# Altium PCB ECS_V1.01.PcbDoc (part 2 of 2)
Units mil, origin at the board's own origin, x right, y up, seen from the top; angles counter-clockwise.
Board outline 6229 x 5687 mil, 4 copper layers (Top Layer, Groud, Power, Bottom Layer); 228 components, 181 nets, 866 pads, 721 vias.
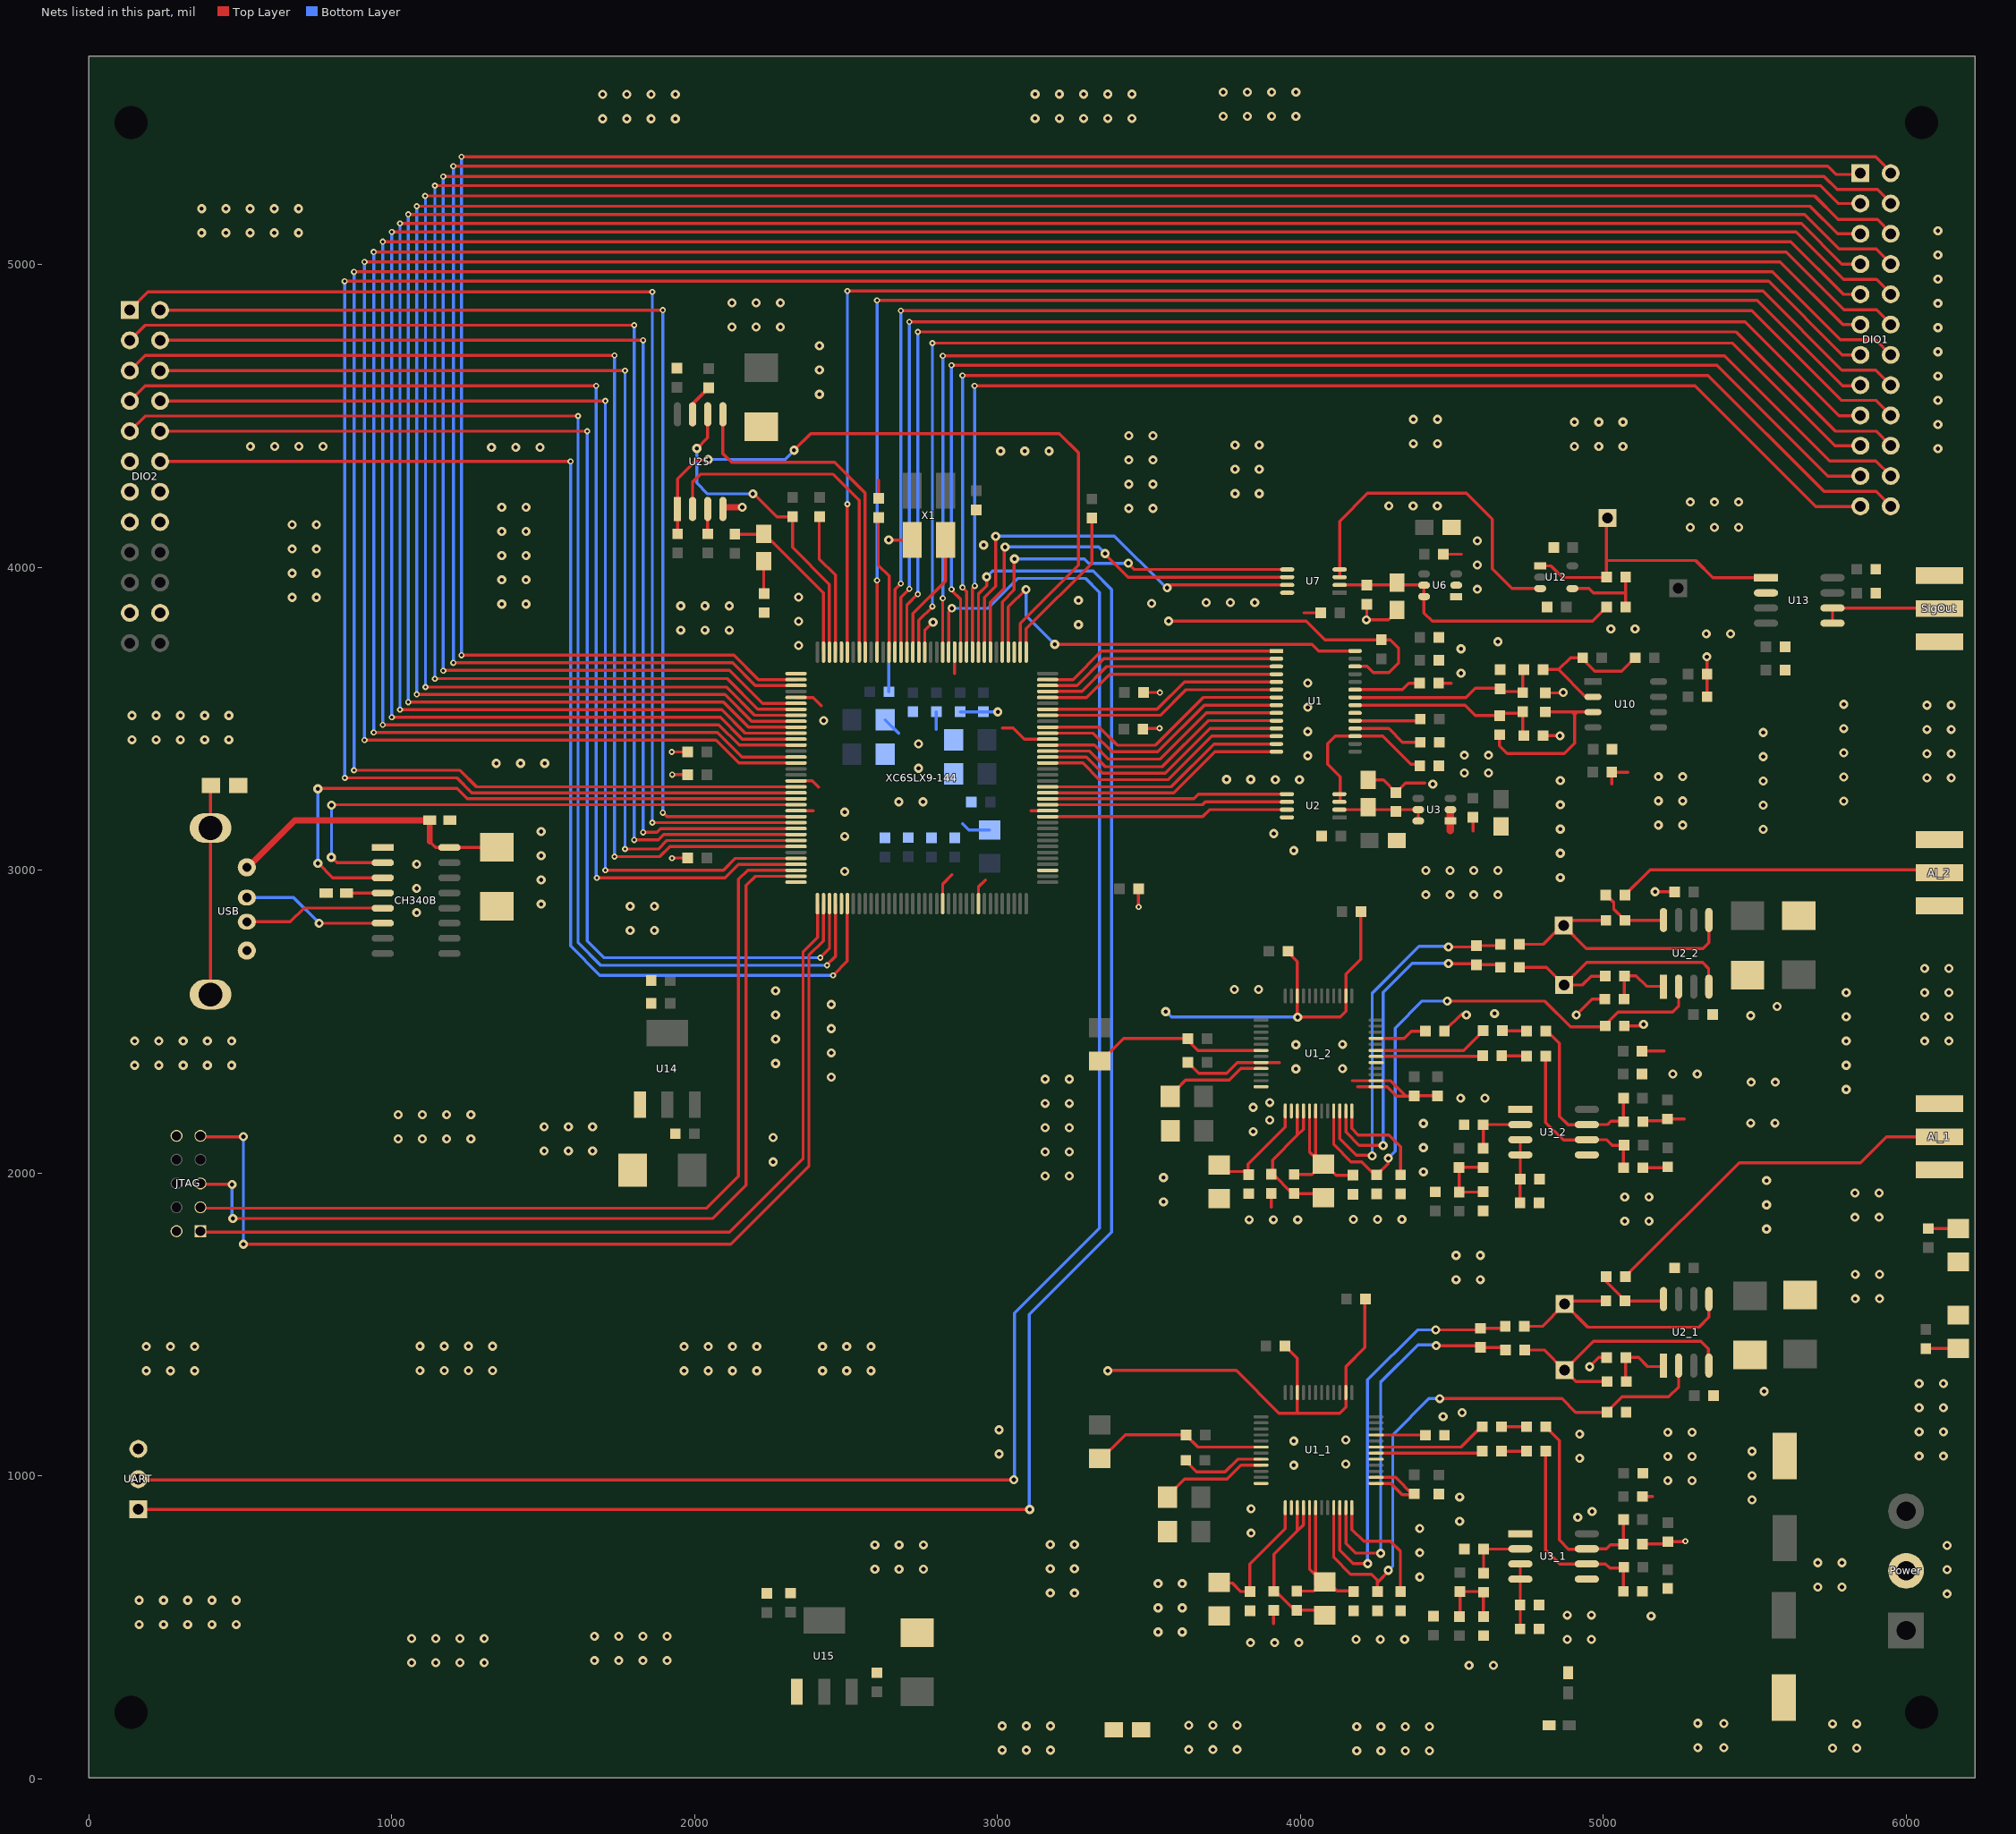
[diagram p4: the nets of this part, all layers, seen from the top]

## Via types
v1: diameter 30, hole 14, Top Layer to Bottom Layer, 624 vias
v2: diameter 20, hole 10, Top Layer to Bottom Layer, 77 vias
v3: diameter 50, hole 28, Top Layer to Bottom Layer, 19 vias
v4: diameter 28, hole 14, Top Layer to Bottom Layer, 1 vias

## Nets (pads, with @x,y where several pads share a name; then routed paths per layer and width w, separated by ;. In a path a pad name is that pad's centre, name@x,y a point inside that pad or via, vN(x,y) a via of type N, cw(c..) or ccw(c..) an arc to the next point about the centre after c; other vN are vias at no path point) (continued)
AGND: AI_1.2 AI_2.2 C1.1 C2.1 C2_1.2 C2_2.2 C4.2 C5_1.2 C5_2.2 C6.2 C7.1 C9.1 C10.2 C10_1.2 C10_2.2 C12.1 C13.2 C14.1 C15.2 C15_1.2 C15_2.2 C17.2 C17_1.2 C17_2.2 C18.2 C18_1.2 C18_2.2 C19_1.2 C19_2.2 C21.2 C21_1.2 C21_2.2 C22.2 C22_1.2 C22_2.2 C23.2 C23_1.2 C23_2.2 C24.2 C30.2 C31.2 C32_1.2 C32_2.2 C34_1.2 C34_2.2 C35_1.2 C35_2.2 C36_1.2 C36_2.2 C38_1.2 C38_2.2 C39_1.2 C39_2.2 C50_1.2 C50_2.2 C60_1.2 C60_2.2 C62.2 C69_1.1 C69_2.1 C70.2 C70_1.1 C70_2.1 C71_1.1 C71_2.1 C76.1 C77.1 C78.2 C79.2 C87.1 C88.1 C105.1 C107.2 D1.2 D3.1 Power.2 R3.2 R5.1 R10.1 R10_1.1 R10_2.1 R11.2 R11_1.1 R11_2.1 R12.2 R14_1.2 R14_2.2 R15_1.2 R15_2.2 R30_1.2 R30_2.2 R34_1.1 R34_2.1 R38_1.2 R38_2.2 R43_1.1 R43_2.1 SigOut.2 U1.20 U1_1.1 U1_1.2 U1_1.5 U1_1.32 U1_1.33 U1_1.36 U1_1.38 U1_2.1 U1_2.2 U1_2.5 U1_2.32 U1_2.33 U1_2.36 U1_2.38 U2.8 U3.1 U3.2 U3_1.1 U3_1.5 U3_2.1 U3_2.5 U6.1 U6.2 U7.8 U13.2 | length 3908.3
  Top Layer w10: C23_1.2@3579,951 3617,989 3758,989 3804,1035 U1_1.33@3870,1035 ; C23_2.2@3592,2278 3621,2307 3765,2307 3803,2345 U1_2.33@3870,2345 ; C38_2.2@3628.76,2365.25 3665.02,2329 3756,2329 3792,2365 U1_2.32@3870,2365 3931,2365 ; C38_1.2@3629,1041 3657,1013 3751,1013 3793,1055 U1_1.32@3870,1055 ; 3903.75,1887.25 C34_2.2@3903.75,1932.76 ; 3911.75,512.25 C34_1.2@3911.75,555.76 ; 4011.75,3850.25 C70.2@4066.76,3850.25 ; 4171,2305 U1_2.2@4250,2305 4297,2305 4347,2255 ; 4189,2285 U1_2.1@4250,2285 4286,2285 4317,2254 C36_2.2@4387,2254 ; v1(4218,3827) v1@4219.25,3827 ; C14.1@4219.25,3878.24 v1@4219.25,3827 ; C17.2@4224,3298 4274,3298 C12.1@4316,3256 ; U1_1.1@4250,975 4299,975 4336,938 4371,938 4314,995 U1_1.2@4250,995 ; C13.2@4320,3856 4291,3827 v1@4219.25,3827 ; C12.1@4327,3268 4347,3288 4411,3288 ; C36_2.2@4387,2255 C39_2.2@4459,2255 ; C10.2@4456.24,3617.75 4497.75,3617.75 ; C23.2@4472.24,4043.75 4531.75,4043.75 ; R10_2.1@4475.76,2469.25 4532.5,2526 ; 4569.75,3129.25 C15.2@4569.75,3174.76 ; R11.2@4801.24,3444.75 v1@4850.25,3444.75 ; R10.1@4808.75,3585.76 v1@4867.24,3585.76 ; v1@4911,2523 4962.75,2574.75 R34_2.1@5005.24,2574.75 ; v1@4956,1362 4984.75,1390.75 R34_1.1@5011.24,1390.75 ; 5028.24,3284.76 C78.2@5028.24,3323.75 5080.75,3323.75 ; C5_2.2@5069.24,2485.75 v1@5130.75,2485.75 ; C10_2.2@5128.24,2402.75 5200.75,2402.75 ; R14_1.2@5129.24,774.75 C17_1.2@5217.75,774.75 ; C18_1.2@5129.24,931.75 5162.25,931.75 ; R14_2.2@5129.24,2172.75 C17_2.2@5207.75,2172.75 ; R15_2.2@5130.24,2017.75 C19_2.2@5205.75,2017.75 ; v1@5171.25,2928.75 C70_2.1@5235.24,2928.75 ; C17_2.2@5211.75,2178.76 5268.24,2178.76 ; C17_1.2@5213.75,782.76 v2@5271.24,782.76 ; C77.1@5342.76,3566.76 C77.1@5342.76,3573.25 C76.1@5342.76,3648.25 v1@5342.76,3705
  Top Layer w25: 4495.4,3131.4 U3.2@4495.4,3200.11
  other v1: 4186,92 4266,92 4346,92 4426,92 3631,96 3711,96 3791,96 5757,101 5837,101 5312,102 5398,102 4186,172 4266,172 4346,172 4426,172 3631,176 3711,176 3791,176 5757,181 5837,181 5398,182 5312,183 4557,374 4637,374 3835,449 3915,449 3995,449 4184,460 4264,460 4344,460 4881,460 4961,460 3530,484 3610,484 5158,537 4881,540 4961,540 3530,564 3610,564 6135,610 5708,633 5788,633 3530,644 3610,644 4394,666 6135,690 5708,713 5788,713 4394,746 6135,770 3837,811 4394,826 4526,850 4916,863 4963,882 3837,891 5491,921 4526,930 5213,984 5293,984 5491,1001 3978,1035 4150,1039 4922,1058 5213,1064 5293,1064 6043,1065 6123,1065 5491,1081 3978,1115 4150,1119 4922,1138 5213,1144 5293,1144 6043,1145 6123,1145 4471,1196 4534,1209 6043,1225 6123,1225 5531,1279 6043,1305 6123,1305 4955,1360 5832,1585 5912,1585 4514,1648 4594,1648 5832,1665 5912,1665 4514,1728 4594,1728 5539,1815 5071,1841 5151,1841 3831,1846 3911,1846 3991,1846 4175,1847 4255,1847 4335,1847 5831,1854 5911,1854 5539,1895 3548,1905 5071,1921 5151,1921 5831,1934 5911,1934 5539,1975 3548,1985 4406,2004 4406,2084 3844,2137 4406,2164 5487,2165 5567,2165 3899,2175 3844,2217 3899,2233 4529,2247 4609,2247 5802,2276 5488,2300 5568,2300 5230,2327 5310,2327 3985,2344 4139,2345 5802,2356 3985,2424 4139,2425 5802,2436 6061,2436 6141,2436 5133,2491 5802,2516 6061,2516 6141,2516 5487,2520 4548,2522 4911,2522 4641,2527 5574,2550 5802,2596 6061,2596 6141,2596 3782,2606 3862,2606 6061,2676 6141,2676 4414,2919 4494,2919 4572,2919 4652,2919 5171,2929 4858,2976 4414,2999 4494,2999 4572,2999 4652,2999 4858,3056 3978,3065 3912,3121 5528,3135 4858,3136 5182,3149 5262,3149 5528,3215 4858,3216 5794,3228 5182,3229 5262,3229 4437,3284 5528,3295 4858,3296 3917,3299 3997,3299 3756,3300 3836,3300 6069,3305 6149,3305 5794,3308 5182,3309 5262,3309 4541,3321 4621,3321 5528,3375 4024,3378 4541,3380 4621,3380 6069,3385 6149,3385 5794,3388 4857,3444 5528,3455 4024,3458 6069,3465 6149,3465 5794,3468 4024,3538 6069,3545 6149,3545 5794,3548 4868,3587 4024,3618 4530,3651 5342,3705 4530,3731 4652,3755 5340,3781 5420,3781 5025,3797 5105,3797 3689,3884 3769,3884 3849,3884 4584,3928 4584,4008 4584,4088 5287,4132 5367,4132 5447,4132 4292,4203 4372,4203 4452,4203 5287,4216 5367,4216 5447,4216 3784,4244 3864,4244 3784,4324 3864,4324 6105,4392 4905,4400 4985,4400 5065,4400 3784,4404 3864,4404 4373,4409 4453,4409 6105,4472 4905,4480 4985,4480 5065,4480 4373,4489 4453,4489 6105,4552 6105,4632 6105,4712 6105,4792 6105,4872 6105,4952 6105,5032 6105,5112 3745,5490 3825,5490 3905,5490 3985,5490 3745,5570 3825,5570 3905,5570 3985,5570
  other v2: 5271,784
BT0: XC6SLX9-144.39
BT1: R24.1 U25.1 XC6SLX9-144.38 | length 2326.8
  Top Layer w10: R24.1@1943,4117 1943,4218.08 1943,4292 2006,4355 v1@2046,4355 ; v1@2329,4388 2383,4442 3204,4442 3267,4379 3267,4007 3074.8,3814.8 XC6SLX9-144.38@3074.8,3720.35
  Bottom Layer w10: v1@2043,4357 2299,4357 2328,4386 v1(2328,4387)
  other v1: 2045,4356
CLK+_1: C46_1.2 U1_1.7 | length 364.9
  Top Layer w10: U1_1.7@4250,1095 4530,1095 C46_1.2@4590,1155
CLK+_2: C46_2.2 U1_2.7 | length 380.7
  Top Layer w10: U1_2.7@4250,2405 4539,2405 4601,2467 C46_2.2@4601,2471
CLK-_1: C49_1.2 U1_1.6 | length 340
  Top Layer w10: U1_1.6@4250,1075 C49_1.2@4590,1075
CLK-_2: C49_2.2 U1_2.6 | length 346
  Top Layer w10: U1_2.6@4250,2385 C49_2.2@4596,2385
CML_1: C5_1.1 C50_1.1 U1_1.45 U2_1.2 | length 2036.8
  Top Layer w10: U1_1.45@4110,895 4110,731 4166,675 ; 4167,675 4235,675 4254,656 C50_1.1@4254,615 ; C50_1.1@4254.75,617.76 4254.75,648.75 v1@4292.5,686.5 ; v1(4460,1255) 4864,1255 4909,1210 C5_1.1@5009,1210 ; C5_1.1@5012.24,1210.75 5062.5,1261 5216,1261 5249,1294 U2_1.2@5249,1370
  Bottom Layer w10: v1(4290,688) 4305,703 4305,1136 4424,1255 v1(4460,1255)
CML_2: C5_2.1 C50_2.1 U1_2.45 U2_2.2 | length 1897.5
  Top Layer w10: U1_2.45@4110,2205 4110,2094 4167,2037 4202,2037 4238,2001 C50_2.1@4244,2001 ; C50_2.1@4251.75,1993.76 4289,2031.01 v1@4289,2045 ; v1(4484.75,2567.76) 4807.24,2567.76 4892,2483 5000,2483 5049,2532 5229,2532 5249,2552 U2_2.2@5249,2621
  Bottom Layer w10: v1(4290,2049) 4313,2072 4313,2479 4402,2568 v1@4487,2568
CTR1: DIO2.8 XC6SLX9-144.104 | length 3665.9
  Top Layer w10: DIO2.8@235,4550 v2(1705,4550) ; v2(1705,3000) 2095,3000 2134.25,3039.25 XC6SLX9-144.104@2334.65,3039.25
  Bottom Layer w10: v2(1705,3000) v2(1705,4550)
CTR2: DIO2.10 XC6SLX9-144.111 | length 4080.6
  Top Layer w10: DIO2.10@235,4450 v2(1645,4450) ; v2(2415,2711) 2415,2712 2445,2742 XC6SLX9-144.111@2445,2893
  Bottom Layer w10: v2(1645,4450) 1645,2767 1701,2711 v2(2415,2711)
CTR3: DIO2.12 XC6SLX9-144.114 | length 4114.3
  Top Layer w10: DIO2.12@235,4350 v2(1590,4350) ; v2@2457,2653 2503.94,2699.94 XC6SLX9-144.114@2503.94,2889.65
  Bottom Layer w10: v2(1590,4350) 1590,2750 1687,2653 v2@2453,2653
  other v2: 2456.94,2652.94
D1: DIO2.1 XC6SLX9-144.98 | length 3977.1
  Top Layer w10: DIO2.1@135,4850 195,4910 v2(1860,4910) ; v2(1860,3157.36) XC6SLX9-144.98@2334.65,3157.36
  Bottom Layer w10: v2(1860,3157.36) v2(1860,4910)
D2: DIO2.3 XC6SLX9-144.100 | length 3927.8
  Top Layer w10: DIO2.3@135,4750 185,4800 v2(1800,4800) ; v2(1800,3100) 1880,3100 1897.99,3117.99 XC6SLX9-144.100@2334.65,3117.99
  Bottom Layer w10: v2(1800,3100) v2(1800,4800)
D3: DIO2.5 XC6SLX9-144.102 | length 3889.3
  Top Layer w10: DIO2.5@135,4650 185,4700 v2(1735,4700) ; v2(1735,3045) 1885,3045 1918.62,3078.62 XC6SLX9-144.102@2334.65,3078.62
  Bottom Layer w10: v2(1735,3045) v2(1735,4700)
D4: DIO2.7 XC6SLX9-144.105 | length 3858.8
  Top Layer w10: DIO2.7@135,4550 185,4600 v2(1675,4600) ; v2@1680,2975 2100,2975 2144.57,3019.57 XC6SLX9-144.105@2334.65,3019.57
  Bottom Layer w10: v2@1675,2975 v2(1675,4600)
  other v2: 1677,2975
D5: DIO2.9 XC6SLX9-144.112 | length 4307.8
  Top Layer w10: DIO2.9@135,4450 185,4500 v2(1615,4500) ; v2@2436,2687 2464.57,2715.57 XC6SLX9-144.112@2464.57,2889.65
  Bottom Layer w10: v2(1615,4500) 1615,2760 1689,2686 v2(2437,2686)
D6: DIO2.2 XC6SLX9-144.97 | length 3765
  Top Layer w10: DIO2.2@235,4850 v2(1895,4850) ; v2(1895,3190) 1907.95,3177.05 XC6SLX9-144.97@2334.65,3177.05
  Bottom Layer w10: v2(1895,3190) v2(1895,4850)
D7: DIO2.4 XC6SLX9-144.99 | length 3729.9
  Top Layer w10: DIO2.4@235,4750 v2(1830,4750) ; v2(1830,3125) 1875,3125 1887.68,3137.68 XC6SLX9-144.99@2334.65,3137.68
  Bottom Layer w10: v2(1830,3125) v2(1830,4750)
D8: DIO2.6 XC6SLX9-144.101 | length 3691.4
  Top Layer w10: DIO2.6@235,4650 v2(1770,4650) ; v2(1770,3070) 1880,3070 1908.31,3098.31 XC6SLX9-144.101@2334.65,3098.31
  Bottom Layer w10: v2(1770,3070) v2(1770,4650)
D+: CH340B.5 USB.3 | length 466.9
  Top Layer w10: USB.3@521.21,2829.68 664,2829.68 ; 664.68,2829.68 710,2875 CH340B.5@970,2875
D-: CH340B.6 USB.2 | length 484.5
  Top Layer w10: v1(760,2825) CH340B.6@970,2825
  Bottom Layer w10: USB.2@521.21,2909.68 676,2909.68 ; 675.32,2909.68 v1(760,2825)
DAC904_CLK: U1.28 XC6SLX9-144.40 | length 1451.3
  Top Layer w10: XC6SLX9-144.40@3035.43,3720.35 3035.43,3869.43 3094,3928 v1(3094,3927) ; v1(3189,3746) 4037,3746 ; 4038,3746 4059.8,3724.2 U1.28@4180.47,3724.2
  Bottom Layer w10: v1(3094,3927) 3094,3841 v1@3188,3747
DAC904_D1: U1.1 XC6SLX9-144.35 | length 800.7
  Top Layer w10: XC6SLX9-144.35@3165.35,3629.8 3248.8,3629.8 3343,3724 U1.1@3927,3724
DAC904_D2: U1.2 XC6SLX9-144.34 | length 791.9
  Top Layer w10: XC6SLX9-144.34@3165.35,3610.12 3262.12,3610.12 3350.61,3698.61 U1.2@3920.63,3698.61
DAC904_D3: U1.3 XC6SLX9-144.33 | length 790.8
  Top Layer w10: XC6SLX9-144.33@3165.35,3590.43 3278.43,3590.43 3361,3673 U1.3@3922,3673
DAC904_D4: U1.4 XC6SLX9-144.32 | length 789.2
  Top Layer w10: XC6SLX9-144.32@3165.35,3570.75 3293.75,3570.75 3370,3647 U1.4@3923,3647
DAC904_D5: U1.5 XC6SLX9-144.30 | length 792.2
  Top Layer w10: XC6SLX9-144.30@3165.35,3531.38 3526.38,3531.38 3617,3622 U1.5@3920,3622
DAC904_D6: U1.6 XC6SLX9-144.29 | length 789.6
  Top Layer w10: XC6SLX9-144.29@3165.35,3511.69 3537.69,3511.69 3622,3596 U1.6@3920,3596
DAC904_D7: U1.7 XC6SLX9-144.27 | length 848.7
  Top Layer w10: XC6SLX9-144.27@3165.35,3472.32 3335.68,3472.32 3395,3413 3522,3413 3680,3571 U1.7@3924,3571
DAC904_D8: U1.8 XC6SLX9-144.26 | length 849
  Top Layer w10: XC6SLX9-144.26@3165.35,3452.64 3316.36,3452.64 3378,3391 3529,3391 3683,3545 U1.8@3925,3545
DAC904_D9: U1.9 XC6SLX9-144.24 | length 837.2
  Top Layer w10: XC6SLX9-144.24@3165.35,3413.27 3319.73,3413.27 3366,3367 3536,3367 3689,3520 U1.9@3920,3520
DAC904_D10: U1.10 XC6SLX9-144.23 | length 836
  Top Layer w10: XC6SLX9-144.23@3165.35,3393.58 3304.42,3393.58 3356,3342 3544,3342 3696,3494 U1.10@3917,3494
DAC904_D11: U1.11 XC6SLX9-144.22 | length 840.3
  Top Layer w10: XC6SLX9-144.22@3165.35,3373.9 3293.1,3373.9 3347,3320 3554,3320 3702,3468 U1.11@3922,3468
DAC904_D12: U1.12 XC6SLX9-144.21 | length 845.2
  Top Layer w10: XC6SLX9-144.21@3165.35,3354.21 3281.79,3354.21 3337,3299 3563,3299 3707,3443 U1.12@3928,3443
DAC904_D13: U1.13 XC6SLX9-144.17 | length 816.3
  Top Layer w10: XC6SLX9-144.17@3165.35,3275.47 3573.47,3275.47 3715,3417 U1.13@3923,3417
DAC904_D14: U1.14 XC6SLX9-144.16 | length 813.1
  Top Layer w10: XC6SLX9-144.16@3165.35,3255.79 3581.79,3255.79 3718,3392 U1.14@3922,3392
DAC8551_CLK: U2.6 XC6SLX9-144.14 | length 788.6
  Top Layer w10: XC6SLX9-144.14@3165.35,3216.42 3676.42,3216.42 3686,3226 U2.6@3950,3226
DAC8551_CLK_BIAS: U7.6 XC6SLX9-144.43 | length 1348.2
  Top Layer w10: XC6SLX9-144.43@2976.38,3720.35 2976.38,3885.38 3022,3931 v1@3022,4068 ; v1@3354.5,4044.5 3431.25,3967.75 U7.6@3956.38,3967.75
  Bottom Layer w10: v1@3023,4068 3334,4068 3357,4045 3358,4046 v1(3355,4046)
  other v1: 3025,4067
DAC8551_DIN: U2.7 XC6SLX9-144.12 | length 801.2
  Top Layer w10: XC6SLX9-144.12@3165.35,3177.05 3677.05,3177.05 3700,3200 U2.7@3957,3200
DAC8551_DIN_BIAS: U7.7 XC6SLX9-144.44 | length 1417.1
  Top Layer w10: XC6SLX9-144.44@2956.69,3720.35 2956.69,3900.69 2994,3938 v1(2994,4103) ; v1@3560,3932 3570.16,3942.16 U7.7@3956.38,3942.16
  Bottom Layer w10: v1@2996,4104 3386,4104 3547.5,3942.5
  other v1: 3560,3933
DAC8551_SYN: U2.5 XC6SLX9-144.15 | length 799.8
  Top Layer w10: XC6SLX9-144.15@3165.35,3236.1 3648.1,3236.1 3663,3251 U2.5@3959,3251
DAC8551_SYN_BIAS: U7.5 XC6SLX9-144.41 | length 1236.9
  Top Layer w10: XC6SLX9-144.41@3015.75,3720.35 3015.75,3886.75 3055,3926 v1@3055,4028 ; v1@3422,4016 3429,4016 3451.66,3993.34 U7.5@3956.38,3993.34
  Bottom Layer w10: v1(3056,4028) 3286,4028 3301,4013 v1@3419,4013
  other v1: 3432,4014
DC_OUTPUT: DC_Output.1 R31.2 U12.1 U13.1 | length 963.5
  Top Layer w10: U12.1@4791.72,4005.17 4827.83,4005.17 4866,3967 R31.2@5001,3967 ; 5010,4023 5010.76,4023 ; R31.2@5010.76,3968.25 5010.76,4023 ; DC_Output.1@5010.76,4156 5010.76,4023 ; U13.1@5537,3966 5362,3966 5305,4023 5010.76,4023
DGND: C6_1.2 C6_2.2 C14_1.2 C14_2.2 C16_1.2 C16_2.2 C26.2 C30_1.2 C30_2.2 C33.2 C34.2 C35.2 C36.1 C37.1 C38.1 C39.1 C40.1 C41.1 C42.1 C43.1 C44.1 C45.1 C46.1 C47.2 C48.2 C49.2 C50.2 C51.2 C56.1 C57.1 C58.1 C59.1 C60.1 C61.1 C64.2 C65.2 C66.1 C67.2 C90.1 C91.1 C92.1 C93.1 C94.1 C95.2 CH340B.1 DIO2.11 DIO2.13 DIO2.14 DIO2.15 DIO2.16 DIO2.21 DIO2.22 JTAG.6 JTAG.10 L1.1 R3.1 R19.2 R20.2 U1.26 U1_1.14 U1_1.22 U1_1.30 U1_2.14 U1_2.22 U1_2.30 U14.1 U15.1 U25.4 UART.3 USB.4 X1.2 XC6SLX9-144.3 XC6SLX9-144.13 XC6SLX9-144.25 XC6SLX9-144.49 XC6SLX9-144.54 XC6SLX9-144.68 XC6SLX9-144.73 XC6SLX9-144.77 XC6SLX9-144.91 XC6SLX9-144.96 XC6SLX9-144.108 XC6SLX9-144.113 XC6SLX9-144.130 XC6SLX9-144.136 | length 6588.8
  Top Layer w10: v2(1924.25,3390.75) C46.1@1977.24,3390.75 ; v2(1925.75,3315.75) C38.1@1977.24,3315.75 ; v2@1930.75,3040.75 C37.1@1977.24,3040.75 ; XC6SLX9-144.96@2334.65,3196.73 2391.73,3196.73 ; XC6SLX9-144.91@2334.65,3295.16 2388.84,3295.16 2409,3275 ; XC6SLX9-144.77@2334.65,3570.75 2391.25,3570.75 2418,3544 ; R20.2@2607.25,4228.24 2607.25,4287.75 ; v1@2647.5,4090.5 X1.2@2718.19,4090.5 ; XC6SLX9-144.54@2759.84,3720.35 2759.84,3792.84 v1@2785,3818 ; XC6SLX9-144.130@2818.9,2889.65 2818.9,2954.9 2849,2985 ; 2858.27,3650.27 XC6SLX9-144.49@2858.27,3720.35 ; XC6SLX9-144.136@2937.01,2889.65 2937.01,2945.01 2960,2968 ; 3016,3470 3052,3470 3089.05,3432.95 XC6SLX9-144.25@3165.35,3432.95 ; 3110.27,3196.73 XC6SLX9-144.13@3165.35,3196.73 ; C6_1.2@3342.5,1055.5 3422.25,1135.25 C16_1.2@3622.76,1135.25 ; C6_2.2@3345,2373 3416.25,2444.25 C16_2.2@3628.76,2444.25 ; v1@3364,1348 3788,1348 3929,1207 3990,1207 ; v2@3465,2886 C42.1@3465,2938.99 ; C45.1@3477.76,3468.25 v2@3531.25,3468.25 ; C39.1@3481.76,3587.25 v2@3536.75,3587.25 ; v1@3562,3823 4019,3823 4080.76,3761.24 C26.2@4267.25,3761.24 4296.76,3761.24 4324,3734 4324,3684 4293,3653 4241,3653 4220,3674 U1.26@4183,3674 ; C16_1.2@3623,1133 3661,1095 U1_1.30@3870,1095 ; C16_2.2@3629,2437 3661,2405 U1_2.30@3870,2405 ; C14_1.2@3949.24,1428.75 3990,1387.98 U1_1.22@3990,1275 3990,1207 ; C14_2.2@3956,2732 3990,2698 U1_2.22@3990,2585 v1@3990,2514 ; v1(3991,2515) 4131,2515 4150,2534 U1_2.14@4150,2585 4150,2657 4199,2706 C30_2.2@4199,2863 ; C30_1.2@4205,1579 4213,1571 4213,1424 4150,1361 U1_1.14@4150,1275 4150,1227 4130,1207 3990,1207
  Top Layer w20: U25.4@2092,4199 v1(2157,4199)
  Bottom Layer w10: C49.2@2629.24,3497 2674,3452.24 ; C95.2@2641.24,3589.25 2641.24,3686.24 ; 2797.75,3464.75 C91.1@2797.75,3523.24 ; C92.1@2876.75,3523.24 C93.1@2953.75,3523.24 v1@2994.24,3523.24 ; 2884,3154 2904.76,3133.24 C48.2@2974,3133.24 ; v1@3556,2533 3574,2515 v1(3991,2515)
  other v1: 3015,94 3095,94 3175,94 3015,174 3095,174 3175,174 1065,383 1145,383 1225,383 1305,383 1669,390 1749,390 1829,390 1909,390 1065,463 1145,463 1225,463 1305,463 1669,470 1749,470 1829,470 1909,470 166,509 246,509 326,509 406,509 486,509 166,589 246,589 326,589 406,589 486,589 3174,613 3254,613 2595,692 2675,692 2755,692 3174,693 3254,693 2595,772 2675,772 2755,772 3174,773 3254,773 3005,1072 3005,1152 189,1347 269,1347 349,1347 1965,1347 2045,1347 2125,1347 2205,1347 2422,1347 2502,1347 2582,1347 3364,1347 1093,1348 1173,1348 1253,1348 1333,1348 189,1427 269,1427 349,1427 1965,1427 2045,1427 2125,1427 2205,1427 2422,1427 2502,1427 2582,1427 1093,1428 1173,1428 1253,1428 1333,1428 3157,1990 3237,1990 2259,2037 3157,2070 3237,2070 1503,2073 1583,2073 1663,2073 1021,2113 1101,2113 1181,2113 1261,2113 2259,2117 3157,2150 3237,2150 1503,2153 1583,2153 1663,2153 1021,2193 1101,2193 1181,2193 1261,2193 3157,2230 3237,2230 3157,2310 3237,2310 2451,2317 151,2356 231,2356 311,2356 391,2356 471,2356 2267,2362 2451,2397 151,2436 231,2436 311,2436 391,2436 471,2436 2267,2442 2451,2477 2267,2522 3555,2533 2451,2557 2267,2602 1787,2801 1867,2801 1082,2860 1787,2881 1867,2881 1493,2888 1082,2940 1493,2968 2495,2996 1082,3020 1493,3048 2495,3112 1493,3128 2495,3192 2674,3226 2754,3226 2739,3337 1345,3353 1425,3353 1505,3353 2739,3417 142,3431 222,3431 302,3431 382,3431 462,3431 2426,3494 142,3511 222,3511 302,3511 382,3511 462,3511 3001,3523 2343,3742 1954,3793 2034,3793 2114,3793 3267,3811 2787,3819 2343,3822 3565,3823 1954,3873 2034,3873 2114,3873 1363,3879 1443,3879 3509,3881 3267,3891 671,3901 751,3901 2343,3902 1363,3959 1443,3959 671,3981 751,3981 1363,4039 1443,4039 671,4061 751,4061 2954,4074 2641,4091 1363,4119 1443,4119 671,4141 751,4141 3433,4195 3513,4195 1363,4199 1443,4199 3433,4275 3513,4275 3433,4355 3513,4355 3010,4384 3090,4384 3170,4384 1329,4397 1409,4397 1489,4397 533,4400 613,4400 693,4400 773,4400 3433,4435 3513,4435 2412,4572 2412,4652 2412,4732 2123,4794 2203,4794 2283,4794 2123,4874 2203,4874 2283,4874 372,5105 452,5105 532,5105 612,5105 692,5105 372,5185 452,5185 532,5185 612,5185 692,5185 1696,5482 1776,5482 1856,5482 1936,5482 3124,5483 3204,5483 3284,5483 3364,5483 3444,5483 1696,5562 1776,5562 1856,5562 1936,5562 3124,5563 3204,5563 3284,5563 3364,5563 3444,5563
  other v2: 3466,2879 1925,3040 3535,3469 3536,3587
DIO_1: DIO1.1 XC6SLX9-144.75 | length 7455.8
  Top Layer w10: v2(1203,3685) 2125,3685 2199.88,3610.12 XC6SLX9-144.75@2334.65,3610.12 ; v2(1203,5325) 5741,5325 5768,5298 DIO1.1@5846,5298
  Bottom Layer w10: v2(1203,3685) v2@1203,5324
DIO_2: DIO1.2 XC6SLX9-144.74 | length 7534.1
  Top Layer w10: v2(1230,3710) 2130,3710 2210.2,3629.8 XC6SLX9-144.74@2334.65,3629.8 ; v2(1230,5356) 5900,5356 DIO1.2@5956,5300
  Bottom Layer w10: v2(1230,3710) v2(1230,5356) v2@1230,5357
DIO_3: DIO1.3 XC6SLX9-144.79 | length 7590.2
  Top Layer w10: v2@1140,3633 2107,3633 2208.62,3531.38 XC6SLX9-144.79@2334.65,3531.38 ; v2(1142,5261) 5716,5261 5775,5202 DIO1.3@5847,5202
  Bottom Layer w10: v2(1142,3632) v2@1142,5256
DIO_4: DIO1.4 XC6SLX9-144.78 | length 7657.8
  Top Layer w10: v2@1170,3660 2115,3660 2223.94,3551.06 XC6SLX9-144.78@2334.65,3551.06 ; v2(1170,5291) 5729,5291 5772,5248 5906,5248 DIO1.4@5950,5204
  Bottom Layer w10: v2(1170,3659) v2(1170,5291)
DIO_5: DIO1.5 XC6SLX9-144.81 | length 7709.8
  Top Layer w10: v2@1081,3580 2100,3580 2187.99,3492.01 XC6SLX9-144.81@2334.65,3492.01 ; v2(1082,5193) 5683,5193 5774,5102 DIO1.5@5852,5102
  Bottom Layer w10: v2(1082,3581) v2(1082,5193)
DIO_6: DIO1.6 XC6SLX9-144.80 | length 7775.7
  Top Layer w10: v2(1110,5227) 5698,5227 5776,5149 5905,5149 DIO1.6@5950,5104 ; v2(1111,3605) 2105,3605 2198.31,3511.69 XC6SLX9-144.80@2334.65,3511.69
  Bottom Layer w10: v2@1110,3606 v2(1111,3605) v2@1111,5226
DIO_7: DIO1.7 XC6SLX9-144.83 | length 7830.2
  Top Layer w10: v2@1025,3530 v2(1027,3530) 2090,3530 2167.36,3452.64 XC6SLX9-144.83@2334.65,3452.64 ; v2(1027,5136) 5654,5136 5788,5002 DIO1.7@5853,5002
  Bottom Layer w10: v2(1027,3530) v2(1027,5136) v2@1027,5137
DIO_8: DIO1.8 XC6SLX9-144.82 | length 7890.6
  Top Layer w10: v2@1050,3555 v2(1054,3555) 2095,3555 2177.68,3472.32 XC6SLX9-144.82@2334.65,3472.32 ; v2(1054,5166) 5665,5166 5779,5052 5901,5052 DIO1.8@5948,5005
  Bottom Layer w10: v2(1054,3555) v2(1054,5166)
DIO_9: DIO1.9 XC6SLX9-144.85 | length 7941.4
  Top Layer w10: v2(970,3480) 2080,3480 2146.73,3413.27 XC6SLX9-144.85@2334.65,3413.27 ; v2(970,5076) 5619,5076 5793,4902 DIO1.9@5849,4902
  Bottom Layer w10: v2(970,3480) v2(970,5076) v2@970,5078
DIO_10: DIO1.10 XC6SLX9-144.84 | length 8002.4
  Top Layer w10: v2(1000,3505) 2085,3505 2157.05,3432.95 XC6SLX9-144.84@2334.65,3432.95 ; v2(1000,5108) 5637,5108 5793,4952 5902,4952 DIO1.10@5951,4903
  Bottom Layer w10: v2(1000,3505) v2@1000,5107
DIO_11: DIO1.11 XC6SLX9-144.88 | length 8060.8
  Top Layer w10: v2(910,3430) 2070,3430 2145.79,3354.21 XC6SLX9-144.88@2334.65,3354.21 ; v2(910,5009) 5584,5009 5791,4802 DIO1.11@5850,4802
  Bottom Layer w10: v2(910,3430) v2(910,5009)
DIO_12: DIO1.12 XC6SLX9-144.87 | length 8126.7
  Top Layer w10: v2(940,3455) 2075,3455 2156.1,3373.9 XC6SLX9-144.87@2334.65,3373.9 ; v2(940,5042) 5604,5042 5795,4851 5903,4851 DIO1.12@5952,4802
  Bottom Layer w10: v2(940,3455) v2(940,5042)
DIO_13: DIO1.13 XC6SLX9-144.93 | length 8257.7
  Top Layer w10: v2(844,4945) 5546,4945 5789,4702 DIO1.13@5850,4702 ; v2(845,3305) 1215,3305 1264.21,3255.79 XC6SLX9-144.93@2334.65,3255.79
  Bottom Layer w10: v2(845,3305) v2@845,4946
DIO_14: DIO1.14 XC6SLX9-144.92 | length 8314.7
  Top Layer w10: v2(875,3330) 1225,3330 1279.53,3275.47 XC6SLX9-144.92@2334.65,3275.47 ; v2(875,4976) 5559,4976 5783,4752 5899,4752 DIO1.14@5949,4702
  Bottom Layer w10: v2(875,3330) v2@875,4975
DIO_15: DIO1.15 XC6SLX9-144.62 | length 4525.8
  Top Layer w10: v2(2602,4882) 5508,4882 5790,4600 DIO1.15@5849,4600 ; XC6SLX9-144.62@2602.36,3720.35 v2@2602.36,3956.36
  Bottom Layer w10: v2(2602,3957) v2(2602,4882) v2@2602,4883
DIO_16: DIO1.16 XC6SLX9-144.67 | length 4763.1
  Top Layer w10: XC6SLX9-144.67@2503.94,3720.35 v2@2503.94,4208 ; v2(2504,4913) 5527,4913 5788,4652 5900,4652 DIO1.16@5949,4603
  Bottom Layer w10: v2(2504,4209) v2@2504,4911
DIO_17: DIO1.17 XC6SLX9-144.58 | length 4371.3
  Top Layer w10: XC6SLX9-144.58@2681.1,3720.35 2681.1,3901.1 v2(2709,3929) v2@2709.5,3929.5 ; v2(2709,4811) 5468,4811 5778,4501 DIO1.17@5849,4501
  Bottom Layer w10: v2(2709,3929) v2(2709,4811)
DIO_18: DIO1.18 XC6SLX9-144.59 | length 4544.2
  Top Layer w10: XC6SLX9-144.59@2661.42,3720.35 2661.42,3927.42 v2@2679,3945 ; v2(2681,4848) 5490,4848 5786,4552 5900,4552 DIO1.18@5950,4502
  Bottom Layer w10: v2(2681,3947) v2@2681,4847
DIO_19: DIO1.19 XC6SLX9-144.55 | length 4241.6
  Top Layer w10: XC6SLX9-144.55@2740.16,3720.35 2740.16,3825.16 v2@2785,3870 ; v2(2785,4741) 5426,4741 5765,4402 DIO1.19@5849,4402 DIO1.19@5850,4402
  Bottom Layer w10: v2(2785,3871) v2@2785,4739
DIO_20: DIO1.20 XC6SLX9-144.57 | length 4441.4
  Top Layer w10: XC6SLX9-144.57@2700.79,3720.35 2700.79,3876.79 v2@2737,3913 ; v2(2737,4778) 5438,4778 5766,4450 5901,4450 DIO1.20@5949,4402
  Bottom Layer w10: v2(2737,3912) v2(2737,4778)
DIO_21: DIO1.21 XC6SLX9-144.48 | length 4113.1
  Top Layer w10: v2@2848,3927 2848,3925 2877.95,3895.05 XC6SLX9-144.48@2877.95,3720.35 ; v2(2848,4668) 5375,4668 5742,4301 DIO1.21@5851,4301
  Bottom Layer w10: v2(2848,3928) v2@2848,4667
DIO_22: DIO1.22 XC6SLX9-144.51 | length 4272.4
  Top Layer w10: XC6SLX9-144.51@2818.9,3720.35 v2@2818.9,3898.1 ; v2(2819,4699) 5401,4699 5748,4352 5900,4352 DIO1.22@5948,4304
  Bottom Layer w10: v2(2819,3898) v2(2819,4699) v2@2819,4700
DIO_23: DIO1.23 XC6SLX9-144.46 | length 3972.1
  Top Layer w10: XC6SLX9-144.46@2917.32,3720.35 2917.32,3931.32 v2(2925,3939) ; v2(2924,4600) 5303,4600 5702,4201 DIO1.23@5849,4201
  Bottom Layer w10: v2@2924,3940 v2(2924,4600)
DIO_24: DIO1.24 XC6SLX9-144.47 | length 4164.2
  Top Layer w10: v2(2884,3934) 2897.64,3920.36 XC6SLX9-144.47@2897.64,3720.35 ; v2(2884,4634) 5346,4634 5729,4251 5901,4251 DIO1.24@5950,4202
  Bottom Layer w10: v2@2884,3935 v2(2884,4634) v2@2884,4635
DONE: D5.1 R18.1 XC6SLX9-144.71 | length 567.7
  Top Layer w10: R18.1@2133,4109 2232,4109 2425.2,3915.8 XC6SLX9-144.71@2425.2,3720.35
GCLK_50M: X1.3 XC6SLX9-144.56 | length 458.9
  Top Layer w10: XC6SLX9-144.56@2720.47,3720.35 2720.47,3847.47 2828,3955 2828,4105 X1.3@2807,4126
IOUT+: C19.2 R8.1 R12.1 U1.22 | length 635.2
  Top Layer w10: U1.22@4180.47,3570.66 4546.66,3570.66 4577,3601 R12.1@4659,3601 ; R12.1@4659.25,3599.24 4668.5,3590 4734.24,3590 C19.2@4734.24,3589.24 ; C19.2@4734.24,3599.24 R8.1@4734.24,3663.75
IOUT-: C19.1 R9.1 R11.1 U1.21 | length 636.9
  Top Layer w10: U1.21@4180.47,3545.07 4543.93,3545.07 4578,3511 R9.1@4652,3511 ; R9.1@4657.75,3510.76 4664.99,3518 4734.25,3518 C19.1@4734.25,3523.24 ; R11.1@4734.25,3444.25 C19.1@4734.25,3510.76
M0: R22.1 XC6SLX9-144.69 | length 468.8
  Top Layer w10: R22.1@2411,4167 2411,4028 2464.57,3974.43 XC6SLX9-144.69@2464.57,3720.35
M1: R20.1 XC6SLX9-144.60 | length 459.4
  Top Layer w10: R20.1@2606,4165 2606,4008 2641.73,3972.27 XC6SLX9-144.60@2641.73,3720.35
MISO: U25.2 XC6SLX9-144.65 | length 1162.1
  Top Layer w10: U25.2@1993,4218.08 1993,4282 2019,4308 2457,4308 2543.31,4221.69 XC6SLX9-144.65@2543.31,3720.35
MOSI: U25.5 XC6SLX9-144.64 | length 1156.5
  Top Layer w10: 2093,4375 2093,4477.92 U25.5@2093,4482 ; 2093,4376 2122,4347 2462,4347 2562.99,4246.01 XC6SLX9-144.64@2562.99,3720.35
NetAI_1_1: AI_1.1 R35_1.1 | length 1240.1
  Top Layer w10: R35_1.1@5072.76,1658.25 5448.5,2034 5850,2034 5935,2119 AI_1.1@6122,2119
NetAI_2_1: AI_2.1 R35_2.1 | length 1060.9
  Top Layer w10: R35_2.1@5071.5,2918.02 5154.49,3001 AI_2.1@6098,3001
NetC2_1_1: C2_1.1 U1_1.48 | length 394.8
  Top Layer w10: U1_1.48@4170,895 4170,823 4209,784 4297,784 4330,751 C2_1.1@4330,618
NetC2_2_1: C2_2.1 U1_2.48 | length 340.9
  Top Layer w10: U1_2.48@4170,2205 4170,2147 4191,2126 4292,2126 4331,2087 C2_2.1@4331,1990
NetC10_1: C10.1 U1.23 | length 220.1
  Top Layer w10: U1.23@4180.47,3596.25 4337.25,3596.25 4358,3617 C10.1@4392,3617
NetC11_2: C11.2 U1.19 | length 218.5
  Top Layer w10: U1.19@4180.47,3493.89 C11.2@4399,3493.89
NetC12_2: C12.2 C17.1 U2.2 U3.5 U3.6 | length 292
  Top Layer w10: U2.2@4133,3200 U3.5@4389,3200 ; U3.6@4389.1,3164.1 U3.5@4389.1,3200.11
NetC13_1: C13.1 C14.2 R30.2 U6.5 U6.6 U7.2 | length 1005.1
  Top Layer w10: U7.2@4129.61,3942.16 U6.5@4412,3942.16 ; U6.6@4408.1,3909.1 U6.5@4408.1,3941.11 ; U6.6@4410,3903 4408,3901 4408,3850 4435,3823 4965,3823 5010,3868 R30.2@5010,3873
NetC20_1_1: C20_1.1 C32_1.1 C33_1.2 U1_1.41 U1_1.42 | length 673.1
  Top Layer w10: C33_1.2@3988.25,619.24 4043.24,619.24 4048,624 4061,624 C20_1.1@4084,647 ; 4030,693 C20_1.1@4049,674 ; 4030,694 U1_1.41@4030,895 ; C20_1.1@4050,639 U1_1.42@4050,895 ; C20_1.1@4110,633 4110,630 4120.24,619.76 C32_1.1@4184.75,619.76
NetC20_1_2: C20_1.2 C33_1.1 C34_1.1 U1_1.39 U1_1.40 | length 570.8
  Top Layer w10: C34_1.1@3913,617 3913,741 3990,818 ; C34_1.1@3913,624 C33_1.1@3976,561 ; C33_1.1@3988.25,556.24 C20_1.2@4074.76,556.24 ; U1_1.39@3990,895 3990,818 ; U1_1.40@4010,895 4010,838 3990,818
NetC20_2_1: C20_2.1 C32_2.1 C33_2.2 U1_2.41 U1_2.42 | length 523.4
  Top Layer w10: C33_2.2@3979.25,1995.24 4038.24,1995.24 C20_2.1@4068,2025 ; U1_2.41@4030,2205 4030,2070 C20_2.1@4050,2050 ; C20_2.1@4050,2040 C20_2.1@4050,2050 ; U1_2.42@4050,2205 C20_2.1@4050,2050 ; C20_2.1@4060,2040 C20_2.1@4050,2050 ; C20_2.1@4101,2010 4118.24,1992.76 C32_2.1@4173.75,1992.76
NetC20_2_2: C20_2.2 C33_2.1 C34_2.1 U1_2.39 U1_2.40 | length 514.8
  Top Layer w10: C34_2.1@3907.75,1997.76 C33_2.1@3973.5,1932 ; C34_2.1@3908,1999 3908,2043 3990,2125 ; C33_2.1@3979.25,1932.24 C20_2.2@4069.76,1932.24 ; U1_2.39@3990,2205 3990,2125 ; U1_2.40@4010,2205 4010,2145 3990,2125 ; C20_2.2@4076,1918.76 C20_2.2@4079.01,1918.76
NetC33_1: C33.1 CH340B.4 | length 120
  Top Layer w10: C33.1@850,2925 CH340B.4@970,2925
NetC46_1_1: C46_1.1 R23_1.2 | length 79
  Top Layer w10: C46_1.1@4663.76,1162.25 R23_1.2@4742.75,1162.25
NetC46_2_1: C46_2.1 R23_2.2 | length 81
  Top Layer w10: C46_2.1@4664.76,2469.25 R23_2.2@4745.75,2469.25
NetC49_1_1: C49_1.1 R25_1.2 | length 83
  Top Layer w10: C49_1.1@4663.76,1081.25 R25_1.2@4746.75,1081.25
NetC49_2_1: C49_2.1 R25_2.2 | length 76
  Top Layer w10: C49_2.1@4664.76,2387.25 R25_2.2@4740.75,2387.25
NetC60_1_1: C60_1.1 R30_1.1 U3_1.3 U3_1.4 | length 207
  Top Layer w10: C60_1.1@4726,502 U3_1.4@4726,659 U3_1.3@4726,709
NetC60_2_1: C60_2.1 R30_2.1 U3_2.3 U3_2.4 | length 209.5
  Top Layer w10: C60_2.1@4725.24,1901.75 R30_2.1@4725.24,1984.24 ; R30_2.1@4726,1983 U3_2.4@4726,2060 U3_2.3@4726,2110
NetC61_1_2: C61_1.2 R39_1.2 R43_1.2 R44_1.2 | length 240.6
  Top Layer w10: C61_1.2@4526.75,533.75 R44_1.2@4526.75,617.76 4603.76,617.76 R43_1.2@4603.76,538.24
NetC61_2_2: C61_2.2 R39_2.2 R43_2.2 R44_2.2 | length 242.5
  Top Layer w10: C61_2.2@4523.75,1940.75 R44_2.2@4523.75,2018.76 R39_2.2@4603.75,2018.76 R39_2.2@4607.76,2018.76 ; C61_2.2@4524.25,1937.24 R43_2.2@4604.76,1937.24
NetC89_1: C89.1 R7.1 R8.2 U10.2 | length 510
  Top Layer w10: R8.2@4801.24,3662.75 4852.25,3662.75 ; R7.1@4926,3702 4891.5,3702 4852.25,3662.75 ; R7.1@4929,3700 4972,3657 5060.5,3657 C89.1@5105.24,3701.75 ; U10.2@4971,3572 4943,3572 4852.25,3662.75
NetD1_1: D1.1 R2.1 | length 95.5
  Top Layer w10: R2.1@6072.75,1816.76 D1.1@6168.24,1816.76
NetD3_2: D3.2 R4.1 | length 114.5
  Top Layer w10: R4.1@6065.25,1420.24 D3.2@6179.76,1420.24
NetD5_2: D5.2 R19.1 | length 111.1
  Top Layer w10: R19.1@2227.94,3910.06 D5.2@2227.94,4021.13
NetL1_2: L1.2 USB.5 USB.6 | length 680.4
  Top Layer w10: USB.5@401.21,2593.79 USB.6@401.21,3139.68 L1.2@401.21,3274.21
NetR5_2: R5.2 U1.18 | length 237
  Top Layer w10: U1.18@4180.47,3468.3 4291.7,3468.3 4337,3423 4386,3423 R5.2@4395,3414
NetR9_2: R9.2 R10.2 U10.3 | length 587.6
  Top Layer w10: R9.2@4657.75,3447.76 4657.75,3411.25 4683,3386 4872,3386 4906,3420 4906,3514 ; R10.2@4808.75,3522.76 4897.24,3522.76 ; 4913,3521 4906,3514 ; U10.3@4970.76,3522.76 4897.24,3522.76 ; 4897.24,3522.76 4906,3514
NetR10_1_2: R10_1.2 U1_1.9 | length 162
  Top Layer w10: U1_1.9@4250,1135 R10_1.2@4412,1135
NetR10_2_2: R10_2.2 U1_2.9 | length 166.5
  Top Layer w10: U1_2.9@4250,2445 4343,2445 4366,2468 R10_2.2@4407,2468
NetR12_1_2: R12_1.2 R14_1.1 R23_1.1 U3_1.7 | length 700.3
  Top Layer w10: R23_1.1@4809.76,1162.25 4855,1117.01 4855,788 4885,758 U3_1.7@4945,758 ; U3_1.7@4946,759 5010,759 5023,772 R14_1.1@5063,772 ; R14_1.1@5066.76,772.76 R12_1.2@5066.76,855.25
NetR12_2_2: R12_2.2 R14_2.1 R23_2.1 U3_2.7 | length 623.4
  Top Layer w10: R23_2.1@4809.76,2469.25 4813.75,2469.25 4855,2428 4855,2188 4884,2159 U3_2.7@4973,2159 ; U3_2.7@4946,2160 5014,2160 5025,2171 R14_2.1@5065,2171 ; R14_2.1@5066.76,2179.76 R12_2.2@5066.76,2247.25
NetR13_1_2: R13_1.2 R15_1.1 R25_1.1 U3_1.6 | length 688.6
  Top Layer w10: R25_1.1@4809.76,1081.25 4809.76,756.24 4857,709 U3_1.6@4946,709 5008,709 5022,695 5067,695 R15_1.1@5067,614
NetR13_2_2: R13_2.2 R15_2.1 R25_2.1 U3_2.6 | length 584.6
  Top Layer w10: R25_2.1@4809.76,2386.25 4809.76,2167.24 4868,2109 U3_2.6@4949,2109 ; U3_2.6@4946,2110 5011,2110 5029,2092 R13_2.2@5066.76,2092 ; R15_2.1@5066.76,2020.24 R13_2.2@5066.76,2092 ; R13_2.2@5066.76,2094.25 R13_2.2@5066.76,2092
NetR21_1_2: R21_1.2 R36_1.1 TPIN+_1.1 U2_1.5 | length 862.3
  Top Layer w10: R21_1.2@4739.24,1493.75 4798.75,1493.75 TPIN+_1.1@4867,1562 ; TPIN+_1.1@4872,1568 4949,1491 5316,1491 5349,1524 U2_1.5@5349,1579 ; TPIN+_1.1@4880.25,1577.75 R36_1.1@5008.99,1577.75
NetR21_2_2: R21_2.2 R36_2.1 TPIN+_2.1 U2_2.5 | length 870.2
  Top Layer w10: R21_2.2@4722.98,2755.51 4801.5,2755.51 TPIN+_2.1@4854.75,2808.76 ; TPIN+_2.1@4867.75,2817.76 4943.75,2741.76 5329.75,2741.76 5348.75,2760.76 U2_2.5@5348.75,2835.76 ; TPIN+_2.1@4888,2834.51 R36_2.1@5008.99,2834.51
NetR22_1_2: R22_1.2 R37_1.2 TPIN-_1.1 U2_1.4 | length 893.9
  Top Layer w10: R22_1.2@4740.24,1415.75 4805.25,1415.75 TPIN-_1.1@4872,1349 ; R37_1.2@5021,1311 4910,1311 TPIN-_1.1@4872,1349 ; U2_1.4@5347,1374 5347,1419 5322,1444 4967,1444 TPIN-_1.1@4872,1349
NetR22_2_2: R22_2.2 R37_2.2 TPIN-_2.1 U2_2.4 | length 868
  Top Layer w10: R22_2.2@4722.98,2679.51 4812,2679.51 TPIN-_2.1@4851.75,2639.76 ; TPIN-_2.1@4870,2621 4931,2621 4960.25,2650.25 R37_2.2@5006.76,2650.25 ; TPIN-_2.1@4870.75,2621.76 4944.75,2695.76 5327.75,2695.76 5347.75,2675.76 U2_2.4@5347.75,2617.76
NetR23_1: R23.1 U25.7 | length 147.3
  Top Layer w10: U25.7@1993,4468 1993,4477.92 1993,4539.99 R23.1@2046.25,4593.24
NetR25_1: R25.1 U25.3 | length 111.1
  Top Layer w10: R25.1@2043,4107 U25.3@2043,4218.08
NetR30_1: R30.1 R31.1 U12.4 | length 283.7
  Top Layer w10: U12.4@4898.02,3930.37 4952.63,3930.37 4967,3916 5072,3916 ; R30.1@5073.76,3870 R31.1@5073.76,3968.25 R31.1@5073.76,3973.76
NetR34_1_2: R34_1.2 R37_1.1 U2_1.1 | length 216.6
  Top Layer w10: R37_1.1@5074.24,1311.24 R34_1.2@5074.24,1390.75 5116.25,1390.75 5146,1361 U2_1.1@5199,1361
NetR34_2_2: R34_2.2 R37_2.1 U2_2.1 | length 217.7
  Top Layer w10: R34_2.2@5069.98,2577 5069.98,2651.51 5108,2651.51 5142.75,2616.76 U2_2.1@5198.75,2616.76
NetR35_1_2: R35_1.2 R36_1.2 U2_1.8 | length 216.3
  Top Layer w10: R35_1.2@5009.76,1658.25 5009.76,1641.24 R36_1.2@5063,1588 ; R36_1.2@5071.98,1577.75 U2_1.8@5196,1577.75
NetR35_2_2: R35_2.2 R36_2.2 U2_2.8 | length 230.7
  Top Layer w10: R35_2.2@5011.75,2916.76 5034.75,2893.76 5034.75,2871.75 R36_2.2@5071.98,2834.51 U2_2.8@5195.5,2834.51
NetR38_1_1: R38_1.1 R39_1.1 U3_1.2 | length 189.5
  Top Layer w10: R39_1.1@4604.76,683.24 R38_1.1@4604.76,758.25 U3_1.2@4719.25,758.25
NetR38_2_1: R38_2.1 R39_2.1 U3_2.2 | length 189.5
  Top Layer w10: R39_2.1@4603.76,2088.76 R38_2.1@4603.76,2159.25 ; R38_2.1@4607,2160 U3_2.2@4726,2160
NetSigOut_1: SigOut.1 U13.5 U13.6 | length 416
  Top Layer w10: U13.6@5754,3866 U13.6@5757,3866 SigOut.1@6123,3866 ; U13.5@5757,3816 U13.6@5757,3863
NetU7_3: U7.3 U7.4 U12.3 | length 1119.4
  Top Layer w10: U7.3@4129.61,3965.61 U7.3@4129.61,3967.75 U7.4@4129.61,3993.34 4129.61,4152.61 4222,4245 4548,4245 4634,4159 4634,3996 4699,3931 4794,3931 U12.3@4797,3928
PROG_B: R21.1 XC6SLX9-144.37 | length 531.6
  Top Layer w10: XC6SLX9-144.37@3094.49,3720.35 3094.49,3797.49 3311,4014 R21.1@3311,4162.24
REF_IN: C62.1 U1.17 U2.3 U2.4 | length 560.6
  Top Layer w10: U2.3@4131,3227 4131,3309 4090,3350 4090,3418 4114.71,3442.71 U1.17@4180.47,3442.71 4272.29,3442.71 4365,3350 C62.1@4394,3350
RXD: CH340B.3 XC6SLX9-144.94 | length 2073.6
  Top Layer w10: v1@753,3270 1215,3270 1248.9,3236.1 XC6SLX9-144.94@2334.65,3236.1 ; v1(756,3023) 757,3023 805,2975 CH340B.3@970,2975
  Bottom Layer w10: v1@756,3025 v1(756,3269)
SCK: R26.1 U25.6 XC6SLX9-144.70 | length 1085.6
  Top Layer w10: v1@2005,4383 2005,4390 2043,4428 U25.6@2043,4477.92 ; v1@2195,4244 2272,4167 R26.1@2324,4167 ; R26.1@2323,4171 2323,4066 2444.88,3944.12 XC6SLX9-144.70@2444.88,3720.35
  Bottom Layer w10: v1(2007,4393) 2007,4279 2043,4243 v1@2191,4243
  other v1: 2192,4243
TCK: JTAG.1 XC6SLX9-144.109 | length 2945
  Top Layer w10: JTAG.1@375,1805 2115,1805 2358,2048 2358,2731 2405.51,2778.51 XC6SLX9-144.109@2405.51,2889.65
TDI: JTAG.5 XC6SLX9-144.110 | length 3353.4
  Top Layer w10: JTAG.5@375,2119.96 v1(509.96,2119.96) ; v1@510,1775 520,1765 2120,1765 2377,2022 2377,2719 2425,2767 XC6SLX9-144.110@2425,2893
  Bottom Layer w10: v1(510,1765) v1@510,2115
TDO: JTAG.2 XC6SLX9-144.106 | length 2996.4
  Top Layer w10: JTAG.2@375,1883.74 2038.74,1883.74 2145,1990 2145,2970 2175,3000 XC6SLX9-144.106@2335,3000
TMS: JTAG.3 XC6SLX9-144.107 | length 3134
  Top Layer w10: JTAG.3@375,1962.48 v1(472.52,1962.48) ; v1(475,1850) 2060,1850 2170,1960 2170,2950 2200,2980 XC6SLX9-144.107@2335,2980
  Bottom Layer w10: v1(472.52,1962.48) 472.52,1842.52 475,1845 v1(475,1850)
TXD: CH340B.2 XC6SLX9-144.95 | length 1880.5
  Top Layer w10: v1@801,3043 819,3025 CH340B.2@970,3025 ; v1@802.58,3216.42 XC6SLX9-144.95@2334.65,3216.42
  Bottom Layer w10: v1@801,3043 v1(801,3215)
  other v1: 800,3043
UART2_RX: UART.2 XC6SLX9-144.50 | length 6631.6
  Top Layer w10: UART.2@172.47,986.53 3053.53,986.53 v1(3054,987) ; XC6SLX9-144.50@2838.58,3720.35 2838.58,3853.58 v4@2849,3864
  Bottom Layer w10: v4(2849,3865) 2969,3865 3068,3964 3290,3964 3337,3917 3337,1818 3056,1537 v1@3056,980
UART2_TX: UART.1 XC6SLX9-144.45 | length 6792.6
  Top Layer w10: UART.1@163,889 v1@3099,889 ; XC6SLX9-144.45@2937.01,3720.35 2937.01,3913.01 2964,3940 v1(2964,3969)
  Bottom Layer w10: v1(2964,3969) 2983,3988 3316,3988 3377,3927 3377,1805 3105,1533 v1@3105,889
  other v1: 3106,889
USB5V: C34.1 C35.1 CH340B.16 USB.1 | length 960.3
  Top Layer w10: 1125,3095 1145,3075 CH340B.16@1190,3075 C35.1@1356.54,3075
  Top Layer w20: USB.1@525.5,3008.5 525.5,3010.5 680,3165 C34.1@1110,3165 ; 1125,3095 C34.1@1125,3165
VIN+_1: C24_1.2 R21_1.1 U1_1.46 | length 1382.7
  Top Layer w10: U1_1.46@4130,895 4130,754 4174,710 v1@4221,710 ; v1(4447,1482) 4592,1482 C24_1.2@4593,1483 ; C24_1.2@4594.25,1487.24 R21_1.1@4678,1487.24
  Bottom Layer w10: v1(4222,710) 4222,1317 4387,1482 v1@4449,1482
VIN+_2: C24_2.2 R21_2.1 U1_2.46 | length 1227.5
  Top Layer w10: U1_2.46@4130,2205 4130,2114 4185,2059 v1@4238,2059 ; v1(4488.75,2746.76) C24_2.2@4573.75,2746.76 ; C24_2.2@4581,2751 R21_2.1@4657.51,2751
  Bottom Layer w10: v1(4237,2057) 4237,2594 4392,2749 v1@4480,2749
VIN-_1: C24_1.1 R22_1.1 U1_1.47 | length 1275.5
  Top Layer w10: U1_1.47@4150,895 4150,776.81 4181.81,745 v1@4266,745 ; v1(4448,1430) 4593.25,1430 C24_1.1@4594.25,1431 ; C24_1.1@4594.25,1424.24 R22_1.1@4673.76,1424.24
  Bottom Layer w10: v1(4265,744) 4265,1310 4388,1433 v1@4450,1433
VIN-_2: C24_2.1 R22_2.1 U1_2.47 | length 1115.5
  Top Layer w10: U1_2.47@4150,2205 4150,2136 4194,2092 v1@4264,2092 ; v1(4488.75,2691.76) C24_2.1@4574.75,2691.76 ; C24_2.1@4581,2688.01 R22_2.1@4655.5,2688.01
  Bottom Layer w10: v1(4273,2091) 4273,2597 4369,2693 v1@4481,2693
VREF_1: C21_1.1 C35_1.1 U1_1.37 | length 431.2
  Top Layer w10: C21_1.1@3740,646 3775,646 3803.24,617.76 C35_1.1@3833,617.76 ; C35_1.1@3833.75,617.76 C35_1.1@3833,617.76 ; U1_1.37@3950,895 3950,826 3833,709 C35_1.1@3833,617.76
VREF_2: C21_2.1 C35_2.1 U1_2.37 | length 330.4
  Top Layer w10: C21_2.1@3756,2005 3821,2005 3827,1999 3827,2029 3950,2152 U1_2.37@3950,2205
pads on no net: CH340B.7 CH340B.8 CH340B.9 CH340B.10 CH340B.11 CH340B.12 CH340B.13 CH340B.14 CH340B.15 JTAG.4 JTAG.7 JTAG.8 U1.15 U1.25 U1_1.8 U1_1.44 U1_2.8 U1_2.44 U2_1.7 U2_2.7 U10.1 U10.5 U10.8 U13.8 X1.1 XC6SLX9-144.61 XC6SLX9-144.66 XC6SLX9-144.72

## Polygon pours and split planes (outlines as drawn)
AGND on Top Layer "Top AGND" (solid, remove dead copper, pour order 4): 3631,5640 3631,2505 3440,2314 3440,50 6208,50 6208,5640
DGND on Top Layer "Top GND" (solid, remove dead copper, pour order 0): 50,5640 51,5639 51,50 3420,50 3420,2325 3422,2325 3611,2514 3611,5640
AGND on Bottom Layer "Bot AGND" (solid, remove dead copper, pour order 6): 3631,5640 3631,2505 3440,2314 3440,50 6208,50 6208,5640
DGND on Bottom Layer "BOT GND" (solid, remove dead copper, pour order 2): 50,5640 51,5639 51,50 3420,50 3420,2325 3422,2325 3611,2514 3611,5640
AGND on Groud (split plane): 6207.9,22.1 3440.09,22.1 3440.09,2313.82 3628.13,2501.87 3629.74,2503.96 3630.03,2504.67 3630.74,2506.39 3631.09,2509 3631.09,5668.9 6207.9,5668.9
DGND on Groud (split plane): 3610.91,2513.18 3422.87,2325.13 3421.26,2323.04 3420.26,2320.61 3419.91,2318 3419.91,22.1 19.1,22.1 19.1,5668.9 3610.91,5668.9
AGND on Power (split plane): 6207.9,22.1 3440.09,22.1 3440.09,2314.82 3626.13,2500.87 3627.74,2502.96 3628.03,2503.67 3628.74,2505.39 3629.09,2508 3629.09,5668.9 6207.9,5668.9
3V3 on Power (split plane): 3608.91,2512.18 3422.87,2326.13 3421.26,2324.04 3420.26,2321.61 3419.91,2319 3419.91,22.1 19.1,22.1 19.1,5668.9 3608.91,5668.9

## Other copper
Top Layer:
  region net 3V3: 2496,467 2496,567 2039,567 2039,467
Groud (plane layer: these items are gaps in the copper):
  lines w20: 3430,-1 3430,2318 3621,2509 3621,5689
Power (plane layer: these items are gaps in the copper):
  lines w20: 3430,1 3430,2319 3619,2508 3619,5686

## Silkscreen, mask and mechanical layers (free items; w line width, h text height)
Top Overlay:
  circle w10: c139,219 r112.5
  circle w10: c139,5469 r112.5
  circle w10: c6050,5472 r112.5
  circle w10: c6052,218 r112.5
  lines w10: 290,3705 525,3705 ; 290,3805 525,3805 ; 290,3905 525,3905 ; 290,4000 525,4000 ; 290,4105 525,4105 ; 290,4205 525,4205 ; 290,4305 525,4305 ; 290,4405 525,4405 ; 290,4505 525,4505 ; 290,4605 525,4605 ; 290,4705 525,4705 ; 290,4805 525,4805 ; 290,4905 525,4905 525,4820 525,3704 ; 405,3704 405,4905
  text "ECS_CORE V1.01 05172018" at 3838,4893 h60
  text "D6" at 450,4885 h30 r270
  text "D1" at 335,4865 h30 r270
  text "D2" at 335,4780 h30 r270
  text "D7" at 450,4775 h30 r270
  text "D3" at 335,4675 h30 r270
  text "D8" at 455,4675 h30 r270
  text "D4" at 335,4575 h30 r270
  text "C1" at 455,4565 h30 r270
  text "D5" at 335,4485 h30 r270
  text "C2" at 460,4475 h30 r270
  text "V-" at 326,4376 h30 r270
  text "C3" at 455,4375 h30 r270
  text "V-" at 451,4277 h30 r270
  text "V-" at 328,4275 h30 r270
  text "V-" at 330,4180 h30 r270
  text "V-" at 450,4180 h30 r270
  text "V+" at 336,4075 h30 r270
  text "V+" at 446,4075 h30 r270
  text "V+" at 335,3974 h30 r270
  text "V+" at 445,3974 h30 r270
  text "V-" at 330,3876 h30 r270
  text "V-" at 445,3876 h30 r270
  text "V+" at 329,3778 h30 r270
  text "V+" at 446,3778 h30 r270
  text "8" at -1810,-795 h30
  text "2" at -1490,-795 h30
  text "8" at -1170,-795 h30
  text "2" at -850,-795 h30
  text "+5V" at -1960,-800 h30
  text "+5V" at -1320,-800 h30
Top Solder:
  lines w100: 1,0 0,5690 6275,5690 ; 12,0 6287,0 ; 6276,5669 6280,46
Mechanical 1:
  the board outline again, w20

## Dimensions
6417,-4 to 6330,5696 on Top Overlay
2,-186 to 6265,-127 on Top Overlay

## Text inside footprints (layer, text, board x,y; h text height)
DIO1: Top Overlay "1" at 5829,5402 h50 r270; Top Overlay "2" at 5929,5402 h50 r270; Top Overlay "23" at 5829,4142 h50 r270; Top Overlay "24" at 5929,4142 h50 r270
DIO2: Top Overlay "1" at 115,4950 h50 r270; Top Overlay "2" at 215,4950 h50 r270; Top Overlay "23" at 115,3690 h50 r270; Top Overlay "24" at 215,3690 h50 r270
Power: Top Overlay "-" at 5826.79,429.58 h100; Top Overlay "+" at 5906.79,943.58 h100 r180